# EAGLE board UI_new (EAGLE 9.2.2)
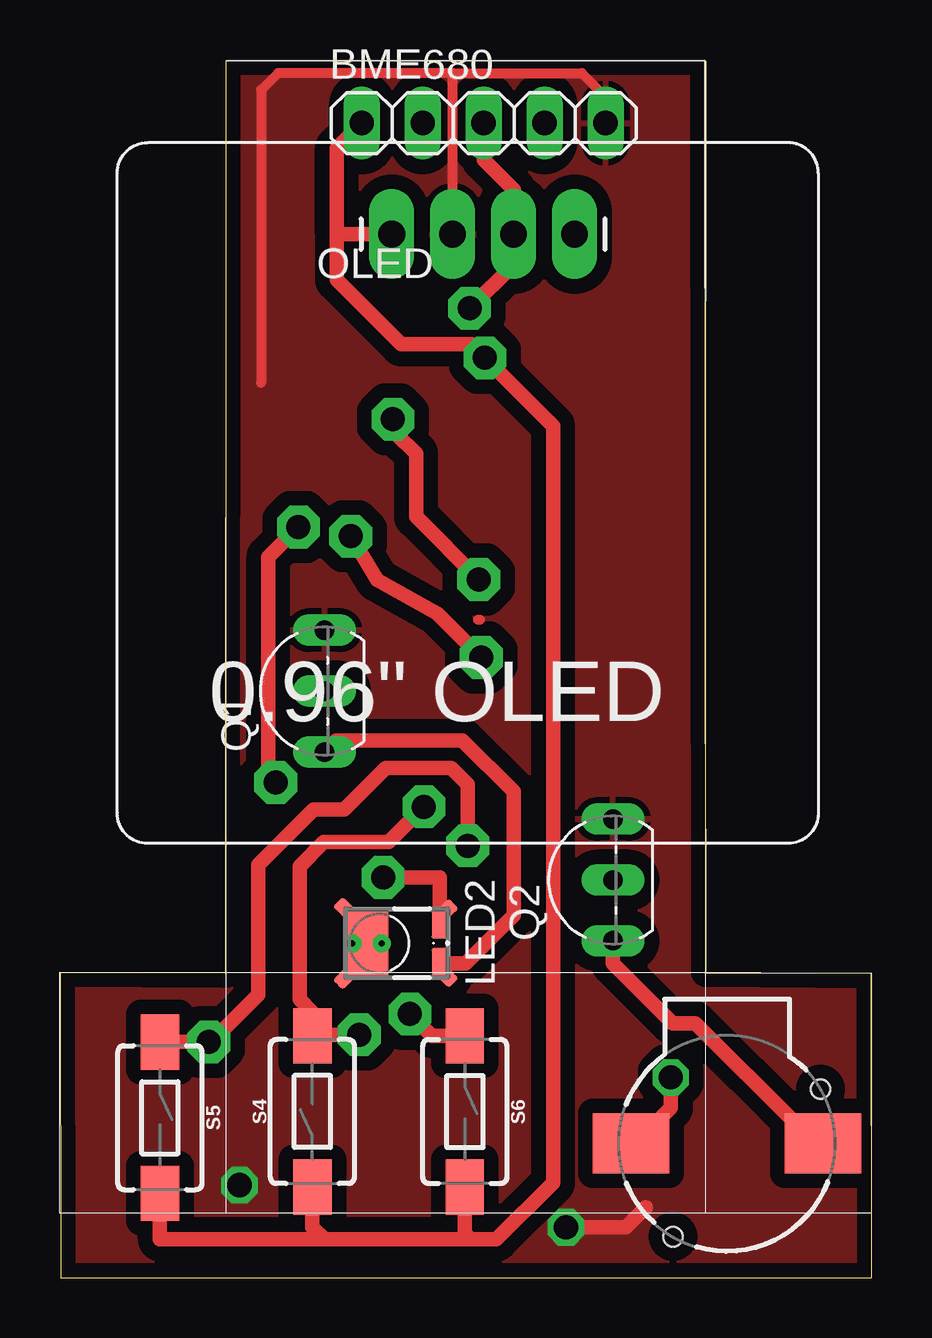
[diagram p0: board, top side]
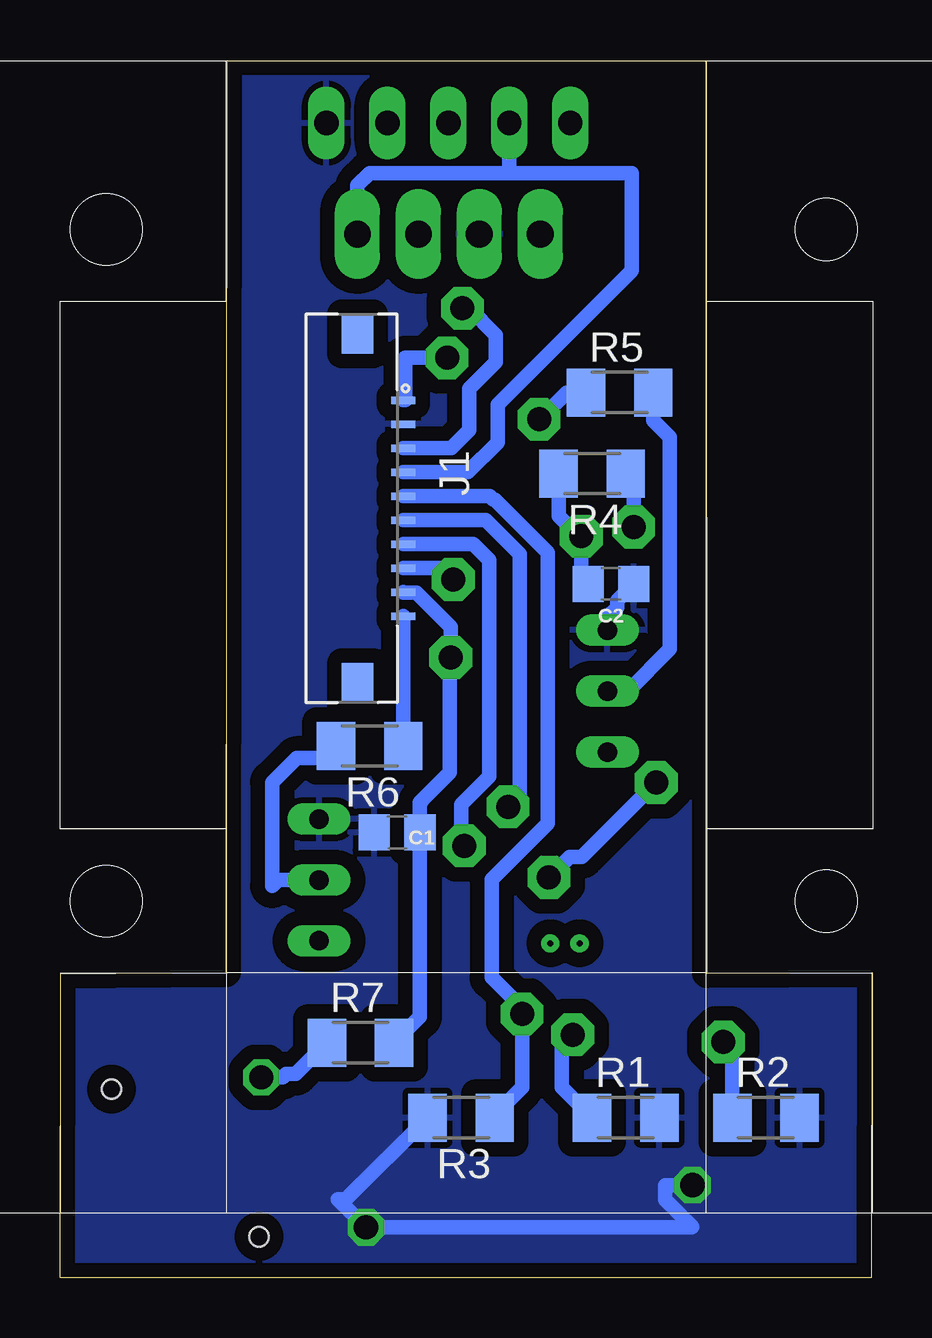
[diagram p1: board, bottom side, seen from below]

Size 33.83 x 50.76 mm. Coordinates in mm from the lower left corner, seen from the top.
Outline: 0.03,0 33.83,0 33.81,12.68 26.9,12.73 26.87,50.76 6.91,50.74 6.88,12.7 0,12.73 0.03,0
Copper layers (1*16): Top 0.035mm / dielectric 1.5mm / Bottom 0.035mm
Design rules "default *": minimum track width 6mil, minimum drill 0.35mm, track to track 6mil, track to pad 6mil, pad to pad 6mil, via to via 6mil, smd to smd 6mil, copper to edge 10mil, drill to drill 6mil, minimum pad ring 10mil, minimum via ring 8mil, stop-mask expansion 4mil, vias tented up to drill 0mil, thermal gap 10mil
Net classes: 0 default: width 0.254 mm, drill 0.508 mm, clearance 0.254 mm

## Footprints (pad centres in the part's own frame; a part is rotated, then mirrored left to right if it is on the bottom)
BUZZER-CCV = smd 3.2 x 2.5: + 4,0; - -4,0 | hole 0.8: -3.9,-2.25; 2.25,3.9
1X05 = drill 1.016 long: 1 -5.08,0; 2 -2.54,0; 3 0,0; 4 2.54,0; 5 5.08,0
C0805 = smd 1.3 x 1.5: 1 -0.95,0; 2 0.95,0
686110183422 = smd 0.3 x 1: 1 -4.5,1.9; 2 -3.5,1.9; 3 -2.5,1.9; 4 -1.5,1.9; 5 -0.5,1.9; 6 0.5,1.9; 7 1.5,1.9; 8 2.5,1.9; 9 3.5,1.9; 10 4.5,1.9 | smd 1.65 x 1.3: Z1 -7.275,0; Z2 7.275,0
LUXEON_REBEL = smd 1.2 x 0.67: A 0.8,-2.51; C -0.8,-2.51 | smd 1 x 0.6 rotated 315: A@1 1.31,-2.75 | smd 1 x 0.6 rotated 225: C@1 -1.31,-2.75 | smd 2.8 x 1.77: TH 0,0.51 | smd 1 x 0.6 rotated 135: TH@1 -1.39,1.39 | smd 1 x 0.6 rotated 45: TH@2 1.39,1.39 | drill 0.25 pad 0.4: TH@3 0,-0.095; TH@4 0,1.125
I2C_OLED_PACKAGE = drill 1.118 pad 1.88 long: 1 0,0; 2 2.54,0; 3 5.08,0; 4 7.62,0
TO92-EBC = drill 0.813 long: B 0,-1.27; C -2.54,-1.27; E 2.54,-1.27
M1206 = smd 1.6 x 2: 1 -1.4,0; 2 1.4,0
TACTILE_SWITCH_SMD_6.0X3.5MM = smd 2.3 x 1.6: 1 -3.15,0; 2 3.15,0

## Placement (x,y rotation side)
B1  Buzzer  [BUZZER-CCV]  27.79,5.61 180 top
BME680  [1X05]  17.65,48.13 0 top
C1  [C0805]  19.79,18.57 0 bottom
C2  [C0805]  10.87,28.93 180 bottom
J1  [686110183422]  21.44,32.08 270 bottom
LED2  LUXEON_REBEL  [LUXEON_REBEL]  13.31,13.94 90 top
OLED  I2C_OLED  [I2C_OLED_PACKAGE]  13.82,43.51 0 top
Q1  BCX59SMD  [TO92-EBC]  9.75,24.46 90 top
Q2  BCX59SMD  [TO92-EBC]  21.77,16.59 90 top
R1  10k  [M1206]  10.26,6.68 0 bottom
R2  10k  [M1206]  4.42,6.68 0 bottom
R3  10k  [M1206]  17.12,6.68 180 bottom
R4  10R  [M1206]  11.66,33.53 180 bottom
R5  10k  [M1206]  10.52,36.91 0 bottom
R6  10k  [M1206]  20.93,22.17 180 bottom
R7  200R  [M1206]  21.31,9.8 0 bottom
S4  MOMENTARY-SWITCH-SPST-SMD-6.0X3.5MM  [TACTILE_SWITCH_SMD_6.0X3.5MM]  10.52,6.93 90 top
S5  MOMENTARY-SWITCH-SPST-SMD-6.0X3.5MM  [TACTILE_SWITCH_SMD_6.0X3.5MM]  4.17,6.68 270 top
S6  MOMENTARY-SWITCH-SPST-SMD-6.0X3.5MM  [TACTILE_SWITCH_SMD_6.0X3.5MM]  16.87,6.93 270 top

## Library data of the parts
B1 = SparkFun
BME680 = pinhead
C1 C2 = eagle-ltspice; PROD_ID: CAP-12416
J1 = Wurth_Elektronik_Electromechanic_FPC_Connectors_&_Flat_Flexible_Cable_rev18c
LED2 = led-lumiled; OC_FARNELL: unknown; OC_NEWARK: unknown
OLED = DIYMall_OLED
Q1 Q2 = transistor-npn
R1-R7 = rcl; SPICEPREFIX: 10K
S4-S6 = SparkFun-Switches; PROD_ID: SWCH-00815; SF_SKU: COM-08229

## Nets
B1: J1.7 R2.1 S5.1
B2: J1.6 R1.1 S4.2
B3: J1.5 R3.1 S6.1
BUZ: J1.10 R6.1
GND: BME680.5 C1.1 C2.1 J1.2 OLED.2 Q1.E Q2.E R1.2 R2.2 R3.2
LED: J1.8 R5.1
N$1: LED2.A LED2.A@1 R4.1
N$2: LED2.C LED2.C@1 Q1.C
N$3: Q1.B R5.2
N$4: B1.-
N$5: B1.+
N$7: Q2.B R6.2
N$8: R7.1
N$9: Q2.C
SCL: BME680.3 J1.3 OLED.3
SDA: BME680.2 J1.4 OLED.4
TH: LED2.TH LED2.TH@1 LED2.TH@2 LED2.TH@3 LED2.TH@4
VCC: BME680.1 J1.1 OLED.1 S4.1 S5.2 S6.2
VIN1: C1.2 C2.2 J1.9 R4.2 R7.2

## Tracks (layer width: path | path; a pad name or v marks a point on that pad's centre or on a via)
B1  (via drill 1 pad 1.78)
  Top 0.254: 6.3,9.83 v6.2,9.83
  Top 0.61: v6.2,9.83 S5.1 | 6.3,9.83 8.25,11.79 8.25,17.22 10.57,19.53 11.84,19.53 13.56,21.26 16.31,21.26 16.99,20.57 v16.99,18.01
  Bottom 0.61: v6.2,9.83 5.82,9.45 R2.1 | J1.7 16.61,30.58 15.95,29.92 15.95,20.89 17.12,19.73 17.12,18.8 16.97,18.64 16.97,18.03 v16.99,18.01
B2  (via drill 1 pad 1.78)
  Top 0.254: 10.26,10.74 10.26,10.34 S4.2
  Top 0.61: 10.26,10.74 10.87,10.13 v12.47,10.13 10.57,10.13 S4.2 10.52,11.07 9.98,11.61 9.98,17.15 11,18.16 13.69,18.16 v15.16,19.63
  Bottom 0.254: 12.93,10.11 12.91,10.13 v12.47,10.13
  Bottom 0.61: 12.93,10.11 12.93,7.95 R1.1 | J1.6 16.09,31.58 14.68,30.18 14.68,20.12 v15.16,19.63
B3  (via drill 1 pad 1.78)
  Top 0.61: v14.58,11 15.49,10.08 S6.1
  Bottom 0.254: 14.58,11.25 v14.58,11 | 15.72,6.81 R3.1
  Bottom 0.61: 14.58,11.25 15.85,12.52 15.85,16.61 13.51,18.95 13.51,30.23 15.73,32.44 15.79,32.44 15.93,32.58 J1.5 | v14.58,11 14.58,7.95 15.72,6.81
BUZ
  Bottom 0.61: R6.1 J1.10
GND  (via drill 1.02)
  Top 0.406: OLED.2 16.36,50.22 | 16.36,50.22 21.74,50.22 22.76,49.2 22.73,49.17 BME680.5 | 16.36,50.22 9.09,50.22 8.38,49.5 8.38,37.31 | 17.42,27.43 17.5,27.43
  Top 0.61: 24.41,2.95 23.57,2.11 v21.08,2.11
  Bottom 0.61: R3.2 21.92,3.28 22.25,3.28 v21.08,2.11 7.52,2.11 7.49,2.13 8.61,3.25 8.61,3.86 v7.48,3.86 | C2.1 10.61,28.24 10.61,27.95 11.02,27.54 Q1.E
  pour Top (isolate 0.61): -30.33,60.6 -30.33,-13.87 -22.1,-22.1 51.13,-22.1 61.82,-11.4 61.82,54.31 53.04,58.67 arc-90 49.73,61.98 49.73,66.4 -26.09,66.4 -29.16,63.32 -29.16,61.77
  pour Bottom (isolate 0.61): -29.31,60.86 -29.31,-16.18 -23.39,-22.1 -23.16,-22.33 53.31,-22.33 62.92,-12.73 62.92,53.8 50.98,65.74 49.73,65.74 -25.73,65.74 -27.71,63.75 -27.71,62.43 -29.29,60.86
LED  (via drill 1 pad 1.78)
  Top 0.61: v17.45,29.11 14.83,31.72 14.83,34.37 14,35.2 v13.87,35.79
  Bottom 0.61: v13.87,35.79 13.75,35.91 13.72,35.92 12.73,36.91 R5.1 | v17.45,29.11 17.45,29.46 17.58,29.59 J1.8
N$1  (via drill 1 pad 1.78, 1.02 pad 1.78)
  Top 0.61: v8.99,20.65 8.69,20.96 8.69,30.05 v9.93,31.29 | v13.46,16.69 15.82,16.69 LED2.A
  Bottom 0.61: v13.46,16.69 12.6,17.55 12.09,17.55 v8.99,20.65 | v9.93,31.29 9.93,33.2 R4.1
N$2
  Top 0.61: LED2.C@1 16.06,13.11 16.9,13.11 18.9,15.11 18.9,20.27 16.76,22.4 11.51,22.4 Q1.C
N$3
  Bottom 0.61: Q1.B 10.16,24.46 8.42,26.2 8.42,35.04 9.12,35.74 R5.2
N$7
  Bottom 0.254: R6.2 22.84,21.67
  Bottom 0.61: 22.84,21.67 23.98,21.67 24.99,20.65 24.99,16.33 24.74,16.59 Q2.B
N$8  (via drill 1)
  Top 0.61: 25.7,8.1 v25.45,8.36 25.45,7.09 24.69,6.32
  Bottom 0.61: R7.1 24.01,8.51 24.41,8.51 24.56,8.36 v25.45,8.36
N$9
  Top 0.61: Q2.C 23.04,13.11 25.53,10.62 26.47,10.62 30.71,6.38
SCL  (via drill 1 pad 1.78)
  Top 0.61: v17.07,40.41 18.9,42.24 OLED.3 18.9,45.36 17.65,46.61 BME680.3
  Bottom 0.61: J1.3 17.54,34.58 16.79,35.33 16.79,37.06 15.67,38.18 15.67,39.29 16.79,40.41 v17.07,40.41
SDA
  Bottom 0.61: 15.11,46.05 10.01,46.05 10.01,41.99 15.6,36.4 15.6,34.82 16.84,33.58 J1.4 | 15.11,46.05 20.93,46.05 21.44,45.54 OLED.4 | 15.11,46.05 BME680.2
VCC  (via drill 1 pad 1.78)
  Top 0.61: BME680.1 11.53,47.09 11.53,43.51 | 11.53,43.51 OLED.1 | 17.12,1.6 18.19,1.6 20.55,3.96 20.55,35.51 v17.7,38.35 17.14,38.91 14.22,38.91 11.53,41.61 11.53,43.51 | 17.12,1.6 11.02,1.6 | 11.02,1.6 4.17,1.6 S5.2 | 11.02,1.6 10.52,2.11 S4.1 | 17.12,1.6 16.87,1.85 S6.2
  Bottom 0.61: J1.1 19.46,36.58 19.46,38.35 v17.7,38.35
VIN1  (via drill 1 pad 1.78)
  Top 0.61: v17.55,25.86 15.72,27.69 13.23,29.09 v12.12,30.91
  Bottom 0.61: R4.2 13.06,31.76 12.21,30.91 v12.12,30.91 12.12,29.08 11.95,28.92 11.82,29.05 C2.2 | R7.2 18.84,10.88 C1.2 18.84,19.83 18.76,19.86 18.8,19.86 17.6,21.06 17.6,25.81 v17.55,25.86 17.55,27.13 19,28.58 J1.9